# Altium PCB Copy of PCB1_Young.PcbDoc
Units mil, origin at the board's own origin, x right, y up, seen from the top; angles counter-clockwise.
Board outline 2096 x 2836 mil, 2 copper layers (Top Layer, Bottom Layer); 15 components, 26 nets, 102 pads, 0 vias.
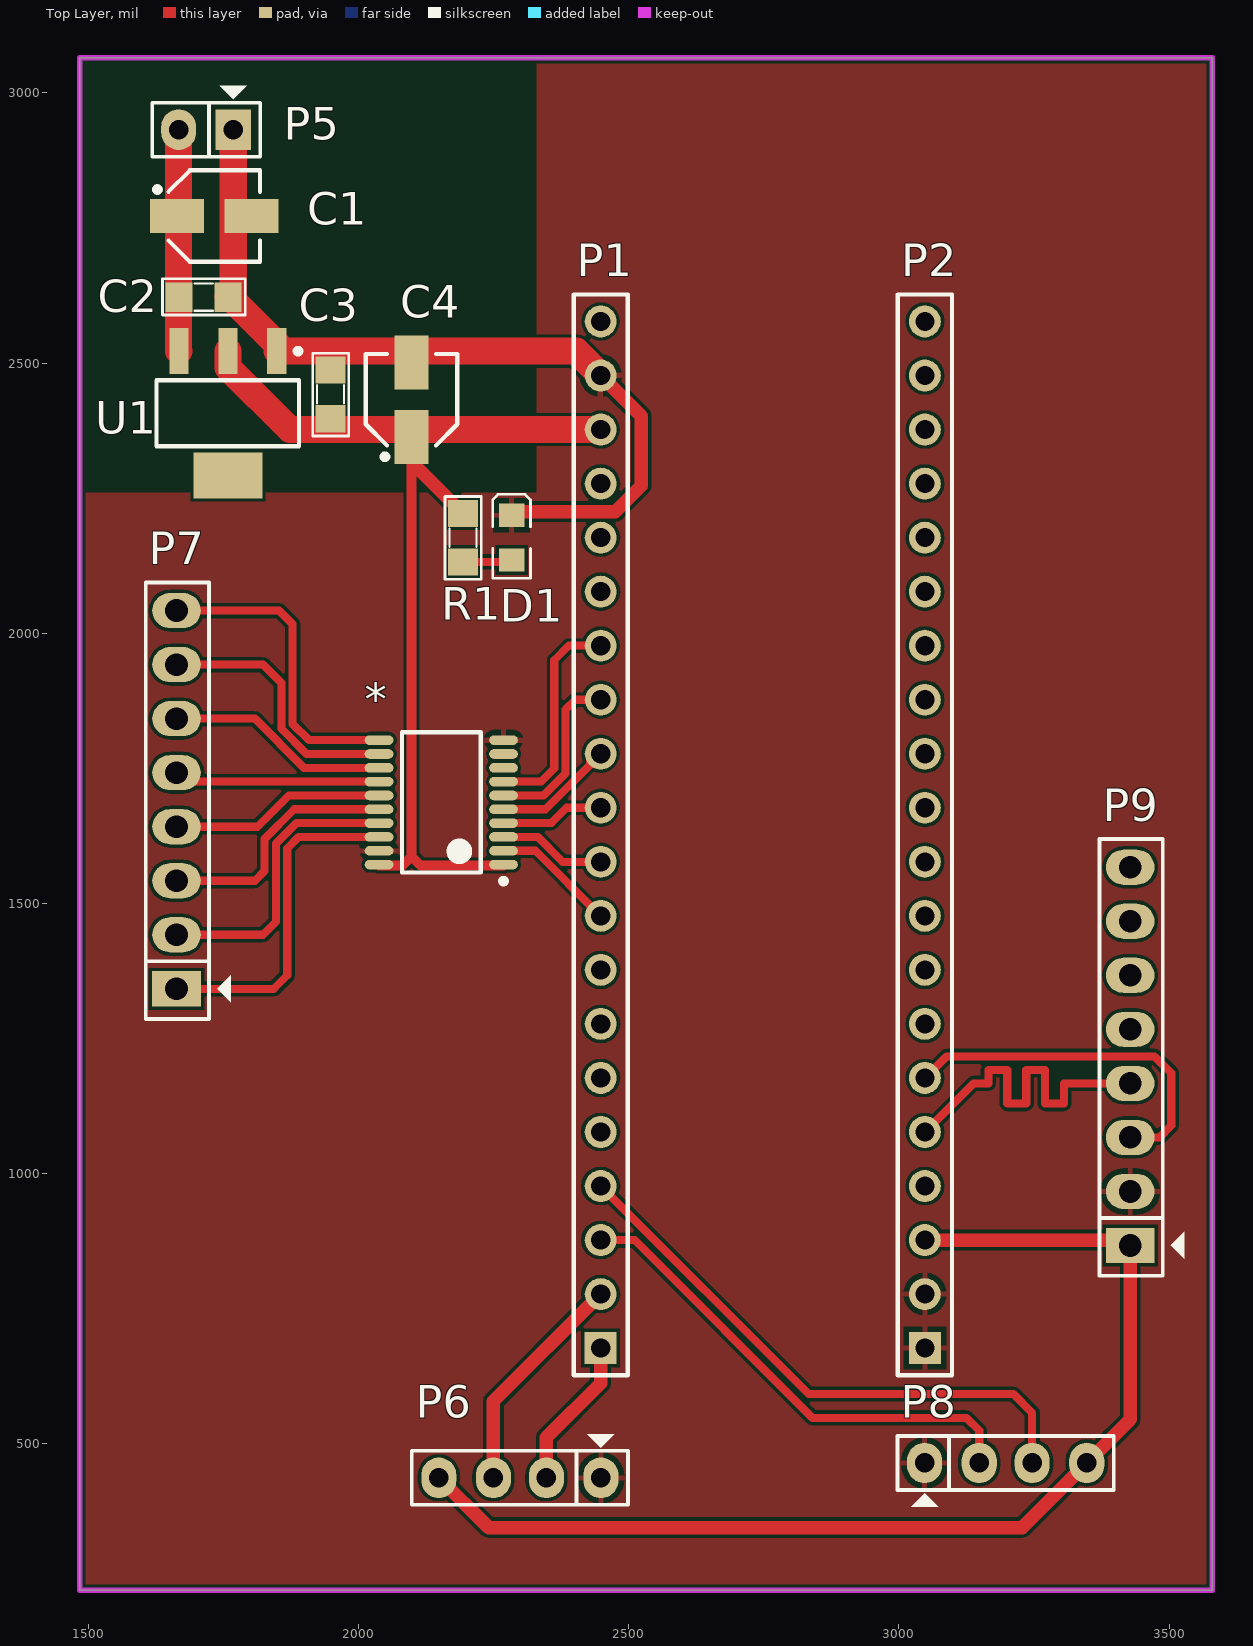
[diagram p0: Top Layer view]
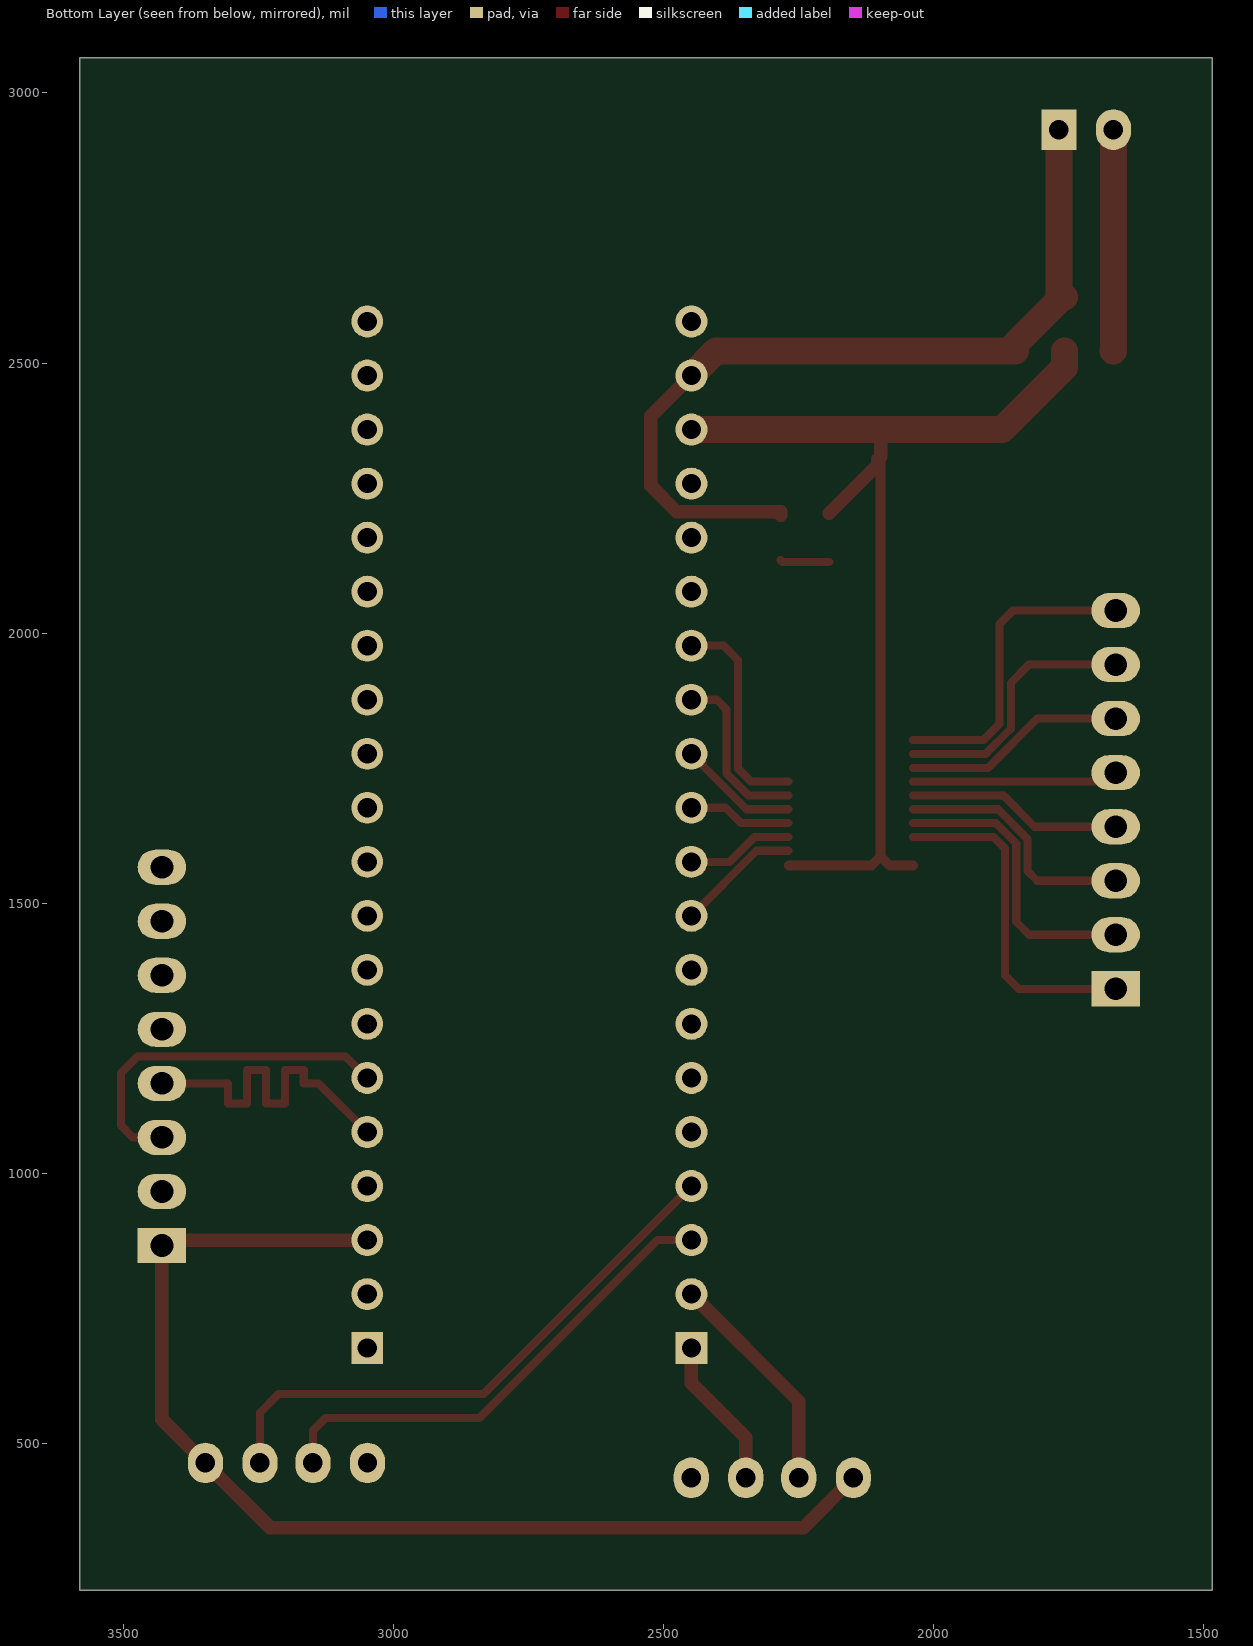
[diagram p1: Bottom Layer view, seen from below]

## Layer stack, top to bottom
Top Solder: solder mask 0.4, Solder Resist, Dk 3.5
Top Layer: signal copper 1.4
Dielectric 1: dielectric 12.6, FR-4, Dk 4.8
Bottom Layer: signal copper 1.4
Bottom Solder: solder mask 0.4, Solder Resist, Dk 3.5

## Board outline
1484,229 3580,229 3580,3065 1484,3065

## Design rules (kind name [scope] priority, off if disabled: settings)
Clearance [All] p1: gap=6 ignorepadtopadclearanceinfootprint=FALSE
DiffPairsRouting [All] p1: maxlimit=10 minlimit=10 mostfreqgap=10 toplayer_minwidth=15 toplayer_maxwidth=15 toplayer_prefwidth=15 bottomlayer_minwidth=15 bottomlayer_maxwidth=15 bottomlayer_prefwidth=15 maxuncoupledlength=500
MinimumSolderMaskSliver [All] p1: minsoldermaskwidth=6
PolygonConnect [All] p1: connectstyle=Relief reliefconductorwidth=10 reliefentries=4 polygonreliefangle="90 Angle" airgapwidth=10
RoutingVias [All] p1: holewidth=28 width=50 viastyle="Through Hole" minholewidth=28 minwidth=50 maxholewidth=28 maxwidth=50
SilkToSilkClearance [All] p1: silktosilkclearance=0
SilkToSolderMaskClearance [IsPad] p1: minsilkscreentomaskgap=0 clearancetoexposedcopper=TRUE
SolderMaskExpansion [All] p1: expansion=4
Width [All] p1: maxlimit=50 minlimit=10 preferedwidth=25
26 further rules are at their usual default settings.

## Classes and differential pairs
differential pair S: +S_P -S_N

## Components (designator, comment, footprint, x,y, rotation, side; value= is the part's Value field where it differs from the comment)
* "74HC245" TSOP65P630X120-20N 2153,1687 r180 top
C1 "Cap Pol SMD" "CAP ALU SIZE B" 1733,2772 r0 top value=220uF
C2 "Cap Non-Pol SMD" CAP-SM-0805 1758,2622 r180 top value=100nF
C3 "Cap Non-Pol SMD" CAP-SM-0805 1948,2397 r90 top value=100nF
C4 "Cap Pol SMD" "CAP ALU SIZE B" 2098,2432 r90 top value=220uF
D1 "LED SMD" LED_0805_Blue 2283,2177 r90 top
P1 "Header 21-40" HDR1X20 2448,677 r90 top
P2 "Header 1-20" HDR1X20 3048,677 r90 top
P5 "Header 2" JP2 1768,2932 r180 top
P6 "Header 4" JP4 2348.44,437 r180 top
P7 "Header 8" JP8 1663,1342 r90 top
P8 "Header 4" JP4 3147.56,464.5 r0 top
P9 "Header 8" JP8 3428,867 r90 top
R1 "RESISTOR SMD" RES-SM-0805 2193,2132 r90 top value=220
U1 "AMS1117-5" SOT230P700X180-4N 1758,2407 r270 top

## Footprints (in the part's own frame and the unit in brackets; to place one, negate y for a bottom-side part, rotate by r counter-clockwise, add the part's x,y. Pads: shape width x height; smd on the part's side, far side on the other; paste and mask are expansions set on the pad)
"CAP ALU SIZE B" [mm] "Capacitor, Aluminium Electrolytric, 4.3mm L X 4.3mm W X 5.4mm H, IPC Medium Density"
  rect 2.55x1.6 smd: 1(-1.75,0) 2(1.75,0)
  silkscreen extent -2.8,-2.15 2.15,2.15, body extent -2.75,-2.25 2.75,2.25, height 5.7
CAP-SM-0805 [mil]
  rect 50x55 smd: 1(0,0) 2(90,0)
  silkscreen extent -32,-34 121,33, body extent 6,-25 84,25, height 31
HDR1X20 [mm] "Connector; Header; 20 Position"
  rect 1.5x1.5 hole 0.9: 1(0,0)
  round 1.5 hole 0.9: 2(2.54,0) 3(5.08,0) 4(7.62,0) 5(10.16,0) 6(12.7,0) 7(15.24,0) 8(17.78,0) 9(20.32,0) 10(22.86,0) 11(25.4,0) 12(27.94,0) 13(30.48,0) 14(33.02,0) 15(35.56,0) 16(38.1,0) 17(40.64,0) 18(43.18,0) 19(45.72,0) 20(48.26,0)
  silkscreen extent -1.27,-1.27 49.53,1.27
JP2 [mil]
  rect 65x75 hole 36: 1(0,0)
  oval 65x75 hole 36: 2(101,0)
  silkscreen extent -50,-81 150,50, body extent -48,-50 148,48, height 323
JP4 [mil] "Jumper 4"
  oval 65x75 hole 36: 1(-100,0) 2(1,0) 3(99,0) 4(200,0)
  silkscreen extent -150,-81 250,50, body extent -148,-48 248,50, height 323
JP8 [mil] "JP8"
  rect 65x90 hole 42: 1(0,0)
  oval 65x90 hole 42: 2(100,0) 3(200,0) 4(300,0) 5(400,0) 6(500,0) 7(600,0) 8(700,0)
  silkscreen extent -56,-100 752,57, body extent -48,-50 748,48, height 323
LED_0805_Blue [mm] "Chip LED, 2-Leads, Body 2.0x1.3mm, IPC Medium Density"
  rect 1.1x1.2 smd: 1(-1.05,0) 2(1.05,0)
  silkscreen extent -1.91,-0.89 2.03,0.89, body extent -1,-0.63 1,0.62, height 0.68
RES-SM-0805 [mil]
  rect 50x55 smd: 1(0,0) 2(90,0)
  silkscreen extent -32,-34 121,33, body extent 6,-25 84,25, height 31
SOT230P700X180-4N [mm] "SOT223, 4-Leads, Body 6.50x7.00mm (avg), Pitch 2.30mm, IPC Medium Density"
  rect 2.15x0.9 smd: 1(-2.925,2.3) 2(-2.925,0) 3(-2.925,-2.3)
  rect 2.15x3.25 smd: 4(2.925,0)
  silkscreen extent -3.05,-3.35 1.55,3.43, body extent -3.5,-3.35 3.5,3.35, height 1.8
TSOP65P630X120-20N [mm] "TSOP, 20-Leads, Body 6.50x4.40mm, Pitch 0.65mm, IPC Medium Density"
  oval 1.35x0.45 smd: 1(-2.925,2.925) 2(-2.925,2.275) 3(-2.925,1.625) 4(-2.925,0.975) 5(-2.925,0.325) 6(-2.925,-0.325) 7(-2.925,-0.975) 8(-2.925,-1.625) 9(-2.925,-2.275) 10(-2.925,-2.925) 11(2.925,-2.925) 12(2.925,-2.275) 13(2.925,-1.625) 14(2.925,-0.975) 15(2.925,-0.325) 16(2.925,0.325) 17(2.925,0.975) 18(2.925,1.625) 19(2.925,2.275) 20(2.925,2.925)
  silkscreen extent -3.05,-3.3 1.85,3.82, body extent -3.15,-3.3 3.15,3.3, height 1.2

## Part data
C1 C4: "Polarized Capacitor (Radial)"
C2 C3: "Capacitor"
D1: "LED"
P1 P2: library part "Header 20", "Header, 20-Pin", LatestRevisionDate=17-Jul-2002, LatestRevisionNote="Re-released for DXP Platform.", Publisher="Altium Limited"
P5: "Header, 2-Pin", LatestRevisionDate=17-Jul-2002, LatestRevisionNote="Re-released for DXP Platform.", Publisher="Altium Limited"
P6 P8: "Header, 4-Pin", LatestRevisionDate=17-Jul-2002, LatestRevisionNote="Re-released for DXP Platform.", Publisher="Altium Limited"
P7 P9: "Header, 8-Pin", LatestRevisionDate=17-Jul-2002, LatestRevisionNote="Re-released for DXP Platform.", Publisher="Altium Limited"
R1: "Resistor"
U1: library part AMS1117-3.3, Package=None, Availability=Unavailable, MF=NEC, MP=AMS1117-3.3, Price=None, SnapEDA_Link=https://www.snapeda.com/parts/AMS1117-3.3/NEC/view-part/?ref=snap

## Nets (pads, with @x,y where several pads share a name; then routed paths per layer and width w, separated by ;. In a path a pad name is that pad's centre, name@x,y a point inside that pad or via, vN(x,y) a via of type N, cw(c..) or ccw(c..) an arc to the next point about the centre after c; other vN are vias at no path point)
1_IN1: *.2 P1.9 | length 229.7
  Top Layer w15: *.2 2327.57,1597.43 P1.9
1_IN2: *.3 P1.10 | length 198.9
  Top Layer w15: *.3 2331.67,1623.02 2377.7,1577 P1.10
1_IN3: *.4 P1.11 | length 191.6
  Top Layer w15: *.4 2356.61,1648.61 2385,1677 P1.11
1_IN4: *.5 P1.12 | length 234.7
  Top Layer w15: *.5 2346.2,1674.2 2428,1756 2428,1777 P1.12
3.3: P2.3 P6.4 P8.4 P9.1 | length 2106.7
  Top Layer w25: P6.4 2240.44,345 3228.06,345 P8.4 3428,544.94 P9.1 3418,877 P2.3
5V: *.1 *.20 C3.1 C4.1 P1.18 R1.2 U1.2 | length 1922.6
  Top Layer w18: *.20@2037.84,1570.07 2081.07,1570.07 2098,1587 ; C4.1@2098,2317 2098,1587 ; *.1@2268.16,1570.07 2114.93,1570.07 2098,1587
  Top Layer w25: C4.1 2098,2327 2103,2322 2103,2312 R1.2
  Top Layer w50: U1.2 1758,2492 1873,2377 P1.18
CA1: P1.1 P6.2 | length 281.7
  Top Layer w25: P6.2 2347.44,511.44 2448,612 P1.1
CA2: P1.3 P8.2 | length 906.5
  Top Layer w15: P1.3 2511,877 2840,548 3125,548 3148.56,524.44 P8.2
CB1: P1.2 P6.3 | length 422.2
  Top Layer w25: P6.3 2249.44,578.44 P1.2
CB2: P1.4 P8.3 | length 1065.3
  Top Layer w15: P1.4 2833,592 3212,592 3246.56,557.44 P8.3
GND: *.10 *.19 C1.2 C2.1 C3.2 C4.2 D1.2 P1.19 P2.1 P2.2 P5.1 P6.1 P8.1 P9.2 U1.1 | length 1573.6
  Top Layer w25: D1.2 2283,2225.03 2475.03,2225.03 2523,2273 2523,2402 P1.19
  Top Layer w50: P5.1 1768,2632 C2.1 1762.04,2622 1848.55,2535.49 U1.1 2402.84,2522.16 P1.19
Net*_11: *.11 P7.8 | length 582.6
  Top Layer w15: P7.8 1853,2042 1878,2017 1878,1832 1907.84,1802.16 *.11
Net*_12: *.12 P7.7 | length 493
  Top Layer w15: P7.7 1823,1942 1857,1908 1857,1823.3 1903.73,1776.57 *.12
Net*_13: *.13 P7.6 | length 412.5
  Top Layer w15: P7.6 1808,1842 1899.02,1750.98 *.13
Net*_14: *.14 P7.5 | length 381.7
  Top Layer w15: P7.5 1679.61,1725.39 *.14
Net*_15: *.15 P7.4 | length 398.8
  Top Layer w15: P7.4 1813,1642 1870.8,1699.8 *.15
Net*_16: *.16 P7.3 | length 464.4
  Top Layer w15: P7.3 1808,1542 1826,1560 1826,1619.4 1880.81,1674.2 *.16
Net*_17: *.17 P7.2 | length 545.2
  Top Layer w15: P7.2 1823,1442 1847,1466 1847,1610.7 1884.92,1648.61 *.17
Net*_18: *.18 P7.1 | length 628.9
  Top Layer w15: P7.1 1843,1342 1868,1367 1868,1602 1889.02,1623.02 *.18
NetC1_1: C1.1 C2.2 P5.2 U1.3 | length 410
  Top Layer w50: P5.2 1667,2522.61 U1.3
NetD1_1: D1.1 R1.1 | length 91.5
  Top Layer w15: R1.1 2279.34,2132 D1.1
PWM1: *.6 P1.13 | length 322.5
  Top Layer w15: *.6 2342.1,1699.8 2383,1740.7 2383,1859 2401,1877 P1.13
PWM2: *.7 P1.14 | length 401.6
  Top Layer w15: *.7 2337.99,1725.39 2362,1749.4 2362,1950 2389,1977 P1.14
S_N: P2.5 P9.4 | length 667.3
  Top Layer w15: P2.5 3138,1167 3148,1167 3165.5,1167 3165.5,1192 3200.5,1192 3200.5,1167 3200.5,1129.5 3235.5,1129.5 3235.5,1167 3235.5,1192 3270.5,1192 3270.5,1167 3270.5,1129.5 3305.5,1129.5 3305.5,1167 3338,1167 P9.4
S_P: P2.6 P9.3 | length 667.5
  Top Layer w15: P2.6 3088,1217 3473,1217 3504,1186 3504,1089 3482,1067 P9.3
VB: P2.20
pads on no net: *.8 *.9 P1.5 P1.6 P1.7 P1.8 P1.15 P1.16 P1.17 P1.20 P2.4 P2.7 P2.8 P2.9 P2.10 P2.11 P2.12 P2.13 P2.14 P2.15 P2.16 P2.17 P2.18 P2.19 P9.5 P9.6 P9.7 P9.8 U1.4

## Polygon pours and split planes (outlines as drawn)
GND on Top Layer "GND_L01_P000" (solid, remove dead copper, pour order 0): 1484,229 3580,229 3580,3065 1484,3065

## Keep-outs
Top Layer:
  the board outline again, w10

## Other copper
Top Layer:
  pour cut-out: 1495,2259.98 2330,2259.98 2330,3055 1496.43,3055 1495,3053.57
  pour cut-out: 1494,2233